# Allegro board INA193_TEST_V10A.brd
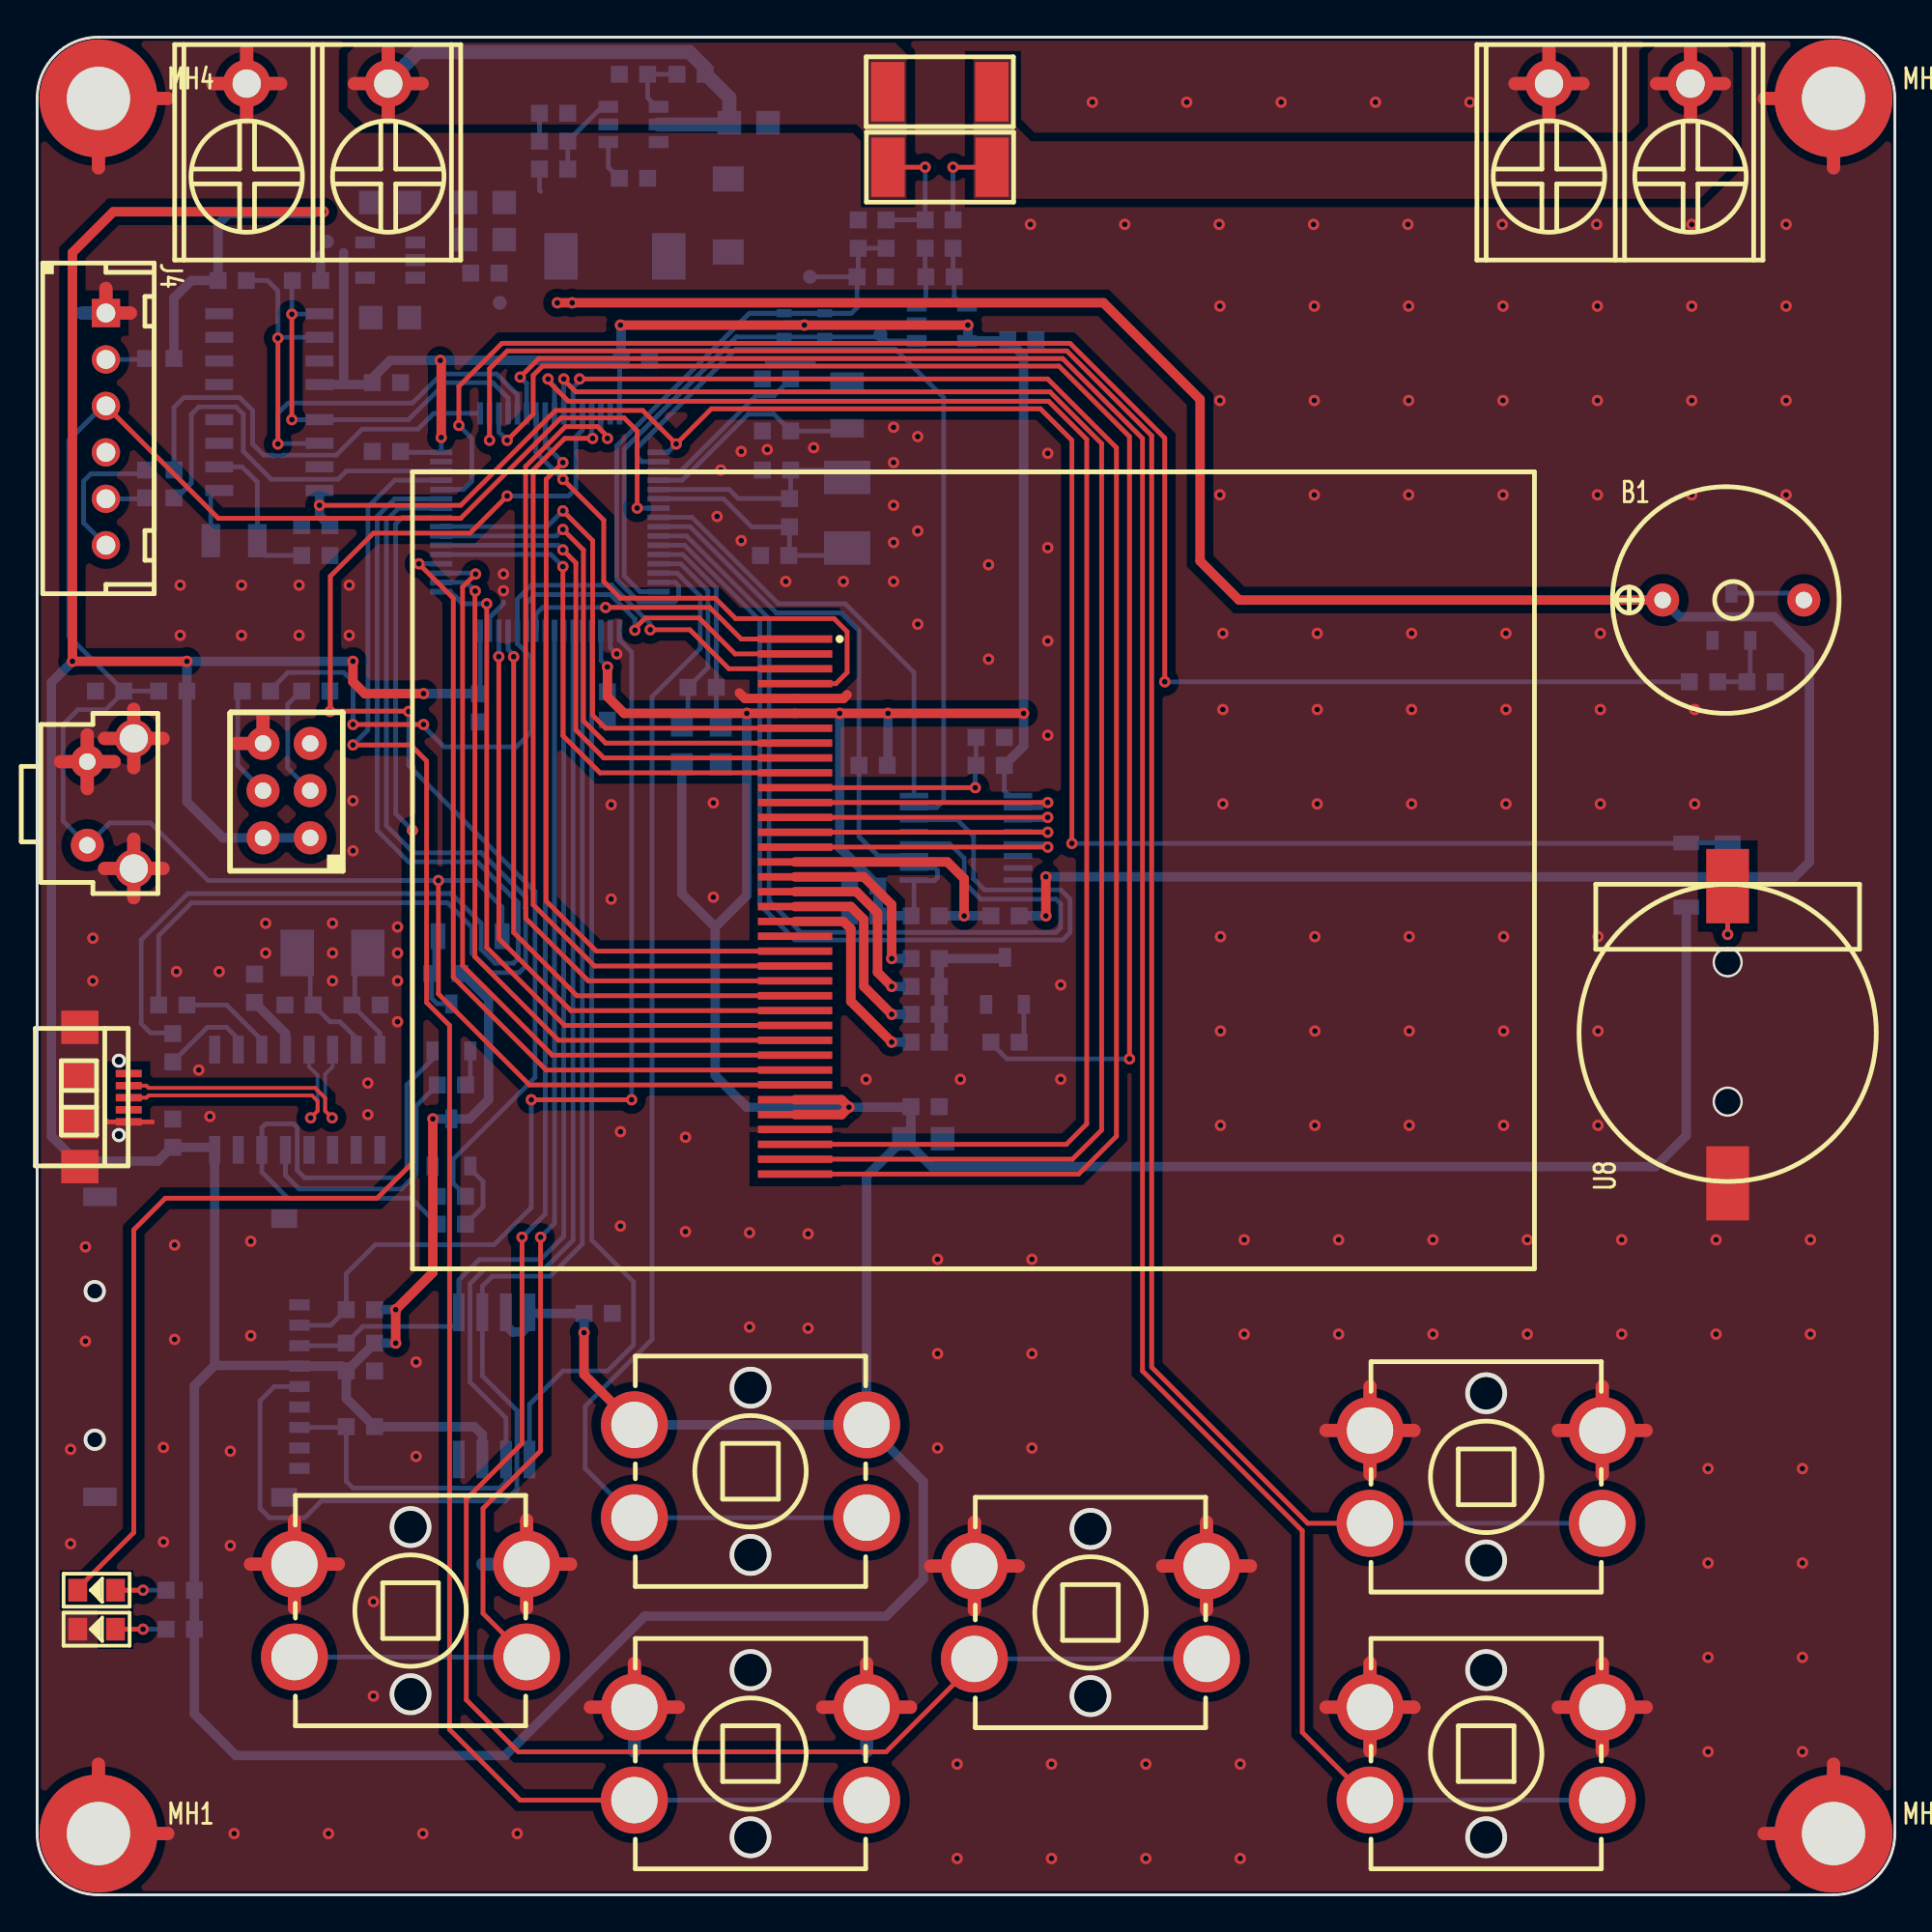
[diagram p0: board, top side]
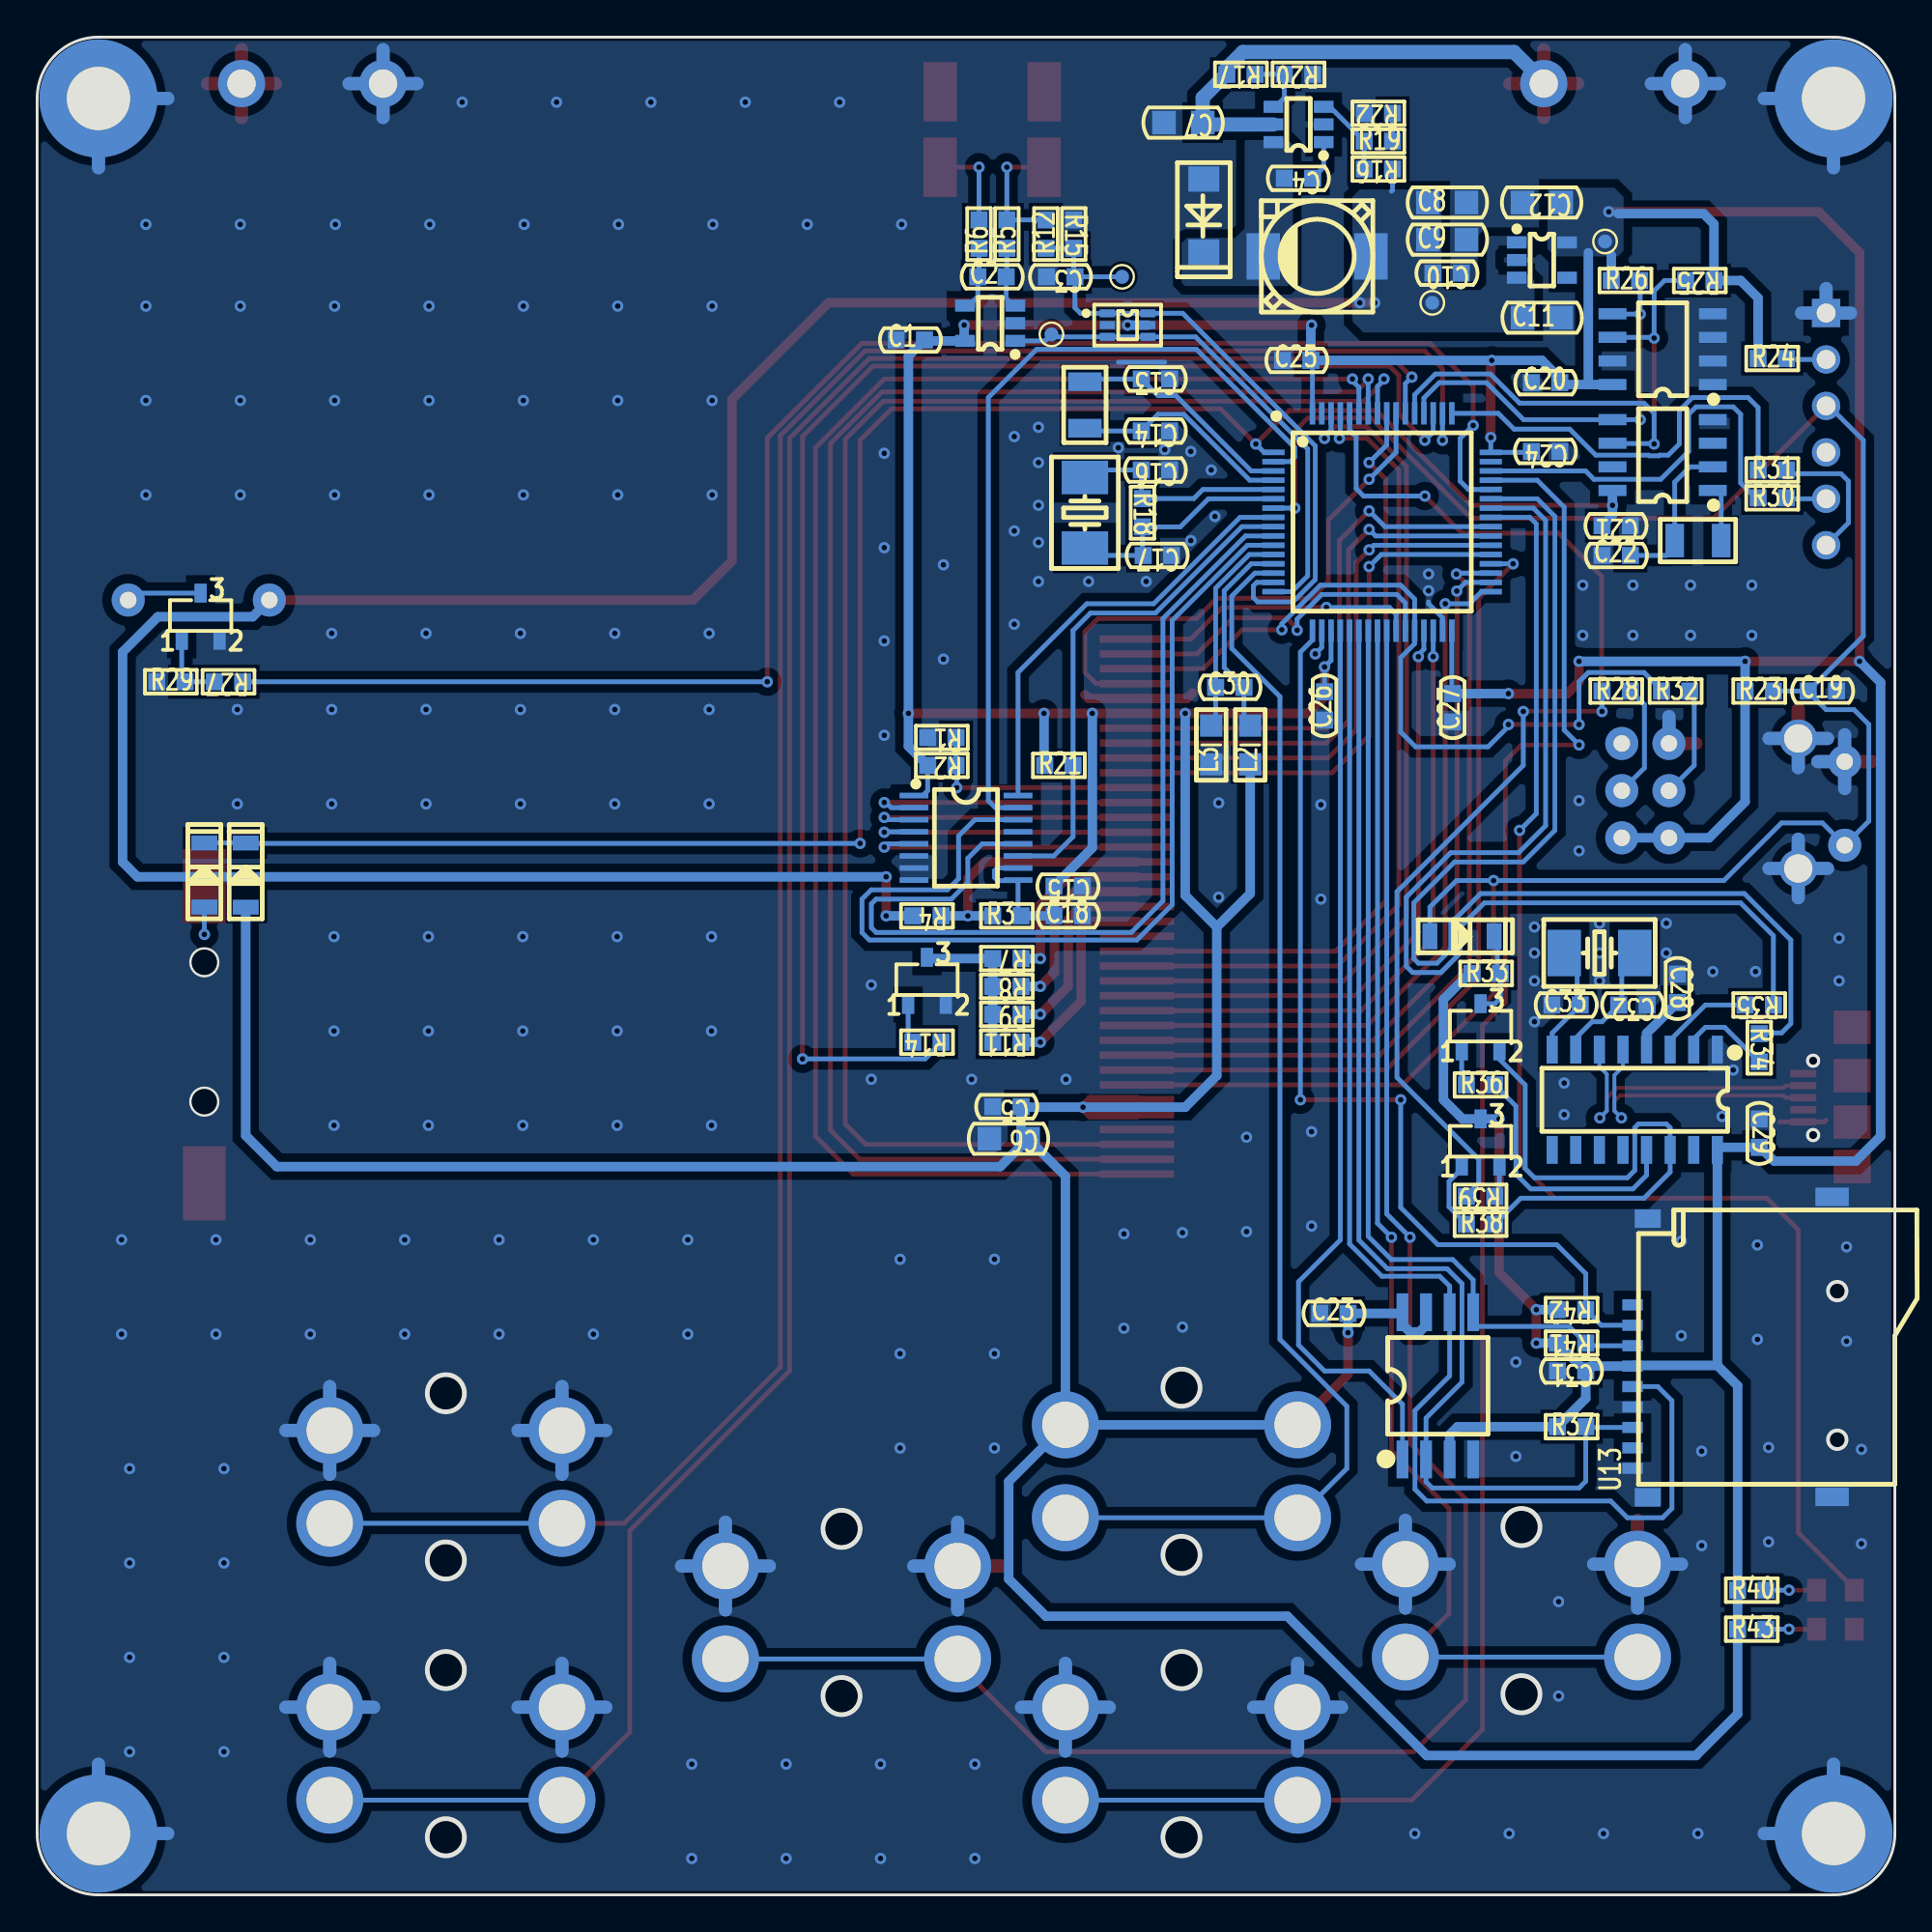
[diagram p1: board, bottom side, seen from below]

Outline 100 x 100 mm; copper layers: TOP, BOTTOM. Coordinates in mm from the lower left corner of the outline.
Outline path: 0,96.7 0,3.3 arc(0.97,0.97) 3.3,0 96.7,0 arc(99.03,0.97) 100,3.3 100,96.7 arc(99.03,99.03) 96.7,100 3.3,100 arc(0.97,99.03) 0,96.7

## Design rules (mm)
net group DP1: nets CH340_D+ CH340_D-

## Placement (name value [footprint] x y rotation side)
B1  BEEP  [BEEP_12X7R6]  87.5 69.7 0 top
C1  0.1uF_50V  [CC0603]  53 83.7 180 bottom
C2  0.1uF_50V  [CC0603]  48.6 87.1 180 bottom
C3  0.1uF_50V  [CC0603]  44.9 87.1 0 bottom
C4  100nF_50V  [CC0603]  32.1 92.4 0 bottom
C5  0.1uF_50V  [CC0603]  47.8 42.43 0 bottom
C6  10uF_25V  [CC0805]  47.7 40.7 0 bottom
C7  10uF_25V  [CC0805]  38.3 95.4 0 bottom
C8  10uF_25V  [CC0805]  24.1 91.1 180 bottom
C9  10uF_25V  [CC0805]  24.1 89.1 180 bottom
C10  0.1uF_50V  [CC0603]  24.1 87.3 0 bottom
C11  10uF_25V  [CC0805]  19 84.9 180 bottom
C12  10uF_25V  [CC0805]  19 91.1 0 bottom
C13  12pF_50V  [CC0603]  39.8 81.6 0 bottom
C14  12pF_50V  [CC0603]  39.8 78.8 0 bottom
C15  0.1uF_50V  [CC0603]  44.5 54.3 0 bottom
C16  20pF_50V  [CC0603]  39.8 76.7 0 bottom
C17  20pF_50V  [CC0603]  39.7 72.1 0 bottom
C18  0.1uF_50V  [CC0603]  44.5 52.7 180 bottom
C19  0.1uF_50V  [CC0603]  3.9 64.8 180 bottom
C20  0.1uF_50V  [CC0603]  18.8 81.4 180 bottom
C21  0.1uF_50V  [CC0603]  15 73.7 0 bottom
C22  12pF_50V  [CC0603]  15 72.1 180 bottom
C23  0.1uF_50V  [CC0603]  30.2 31.3 180 bottom
C24  0.1uF_50V  [CC0603]  18.8 77.7 0 bottom
C25  0.1uF_50V  [CC0603]  32.2 82.6 180 bottom
C26  0.1uF_50V  [CC0603]  30.7 64 90 bottom
C27  0.1uF_50V  [CC0603]  23.8 63.9 90 bottom
C28  0.1uF_50V  [CC0603]  11.7 48.8 270 bottom
C29  0.1uF_50V  [CC0603]  7.3 41 270 bottom
C30  0.1uF_50V  [CC0603]  35.8 65 180 bottom
C31  0.1uF_50V  [CC0603]  17.4 28.2 0 bottom
C32  20pF_50V  [CC0603]  14.1 47.9 0 bottom
C33  20pF_50V  [CC0603]  17.7 47.9 180 bottom
D1  SS14  [DO-214AC]  37.2 90.4 90 bottom
D2  1N4148W-TP  [SOD-123]  88.77 53.3 90 bottom
D3  1N4148W-TP  [SOD-123]  91 53.3 90 bottom
D4  1N4148W-TP  [SOD-123]  24.9 51.6 180 bottom
D5  LED_RED  [LED0805]  3.2 16.4 180 top
D6  LED_RED  [LED0805]  3.2 14.3 180 top
J1  -  [KF7R62-2P]  18.9 97.5 180 top
J2  -  [KF7R62-2P]  89 97.5 180 top
J3  -  [HEADER3X2_2R54]  14.7 56.9 90 top
J4  -  [XH-6A]  3.7 78.9 270 top
L1  SLF6028T-4R7M1R6-PF  [L-SLF6028]  31.1 88.2 90 bottom
L2  BEAD_BLM21PG600  [LC0805]  34.7 61.9 90 bottom
L3  BEAD_BLM21PG600  [LC0805]  36.8 61.9 90 bottom
MH1  Hold-M3  [HOLD250D134]  3.3 3.3 0 top
MH2  Hold-M3  [HOLD250D134]  96.7 3.3 0 top
MH3  Hold-M3  [HOLD250D134]  96.7 96.7 0 top
MH4  Hold-M3  [HOLD250D134]  3.3 96.7 0 top
Q1  S8050_NPN  [SOT23_123]  52.1 49.2 180 bottom
Q2  S8050_NPN  [SOT23_123]  91.2 68.8 180 bottom
Q3  S8050_NPN  [SOT23_123]  22.3 46.7 180 bottom
Q4  S8550_PNP  [SOT23_123]  22.3 40.5 180 bottom
R1  0R/NI  [RC0603]  51.3 62.3 0 bottom
R2  0R/NI  [RC0603]  51.3 60.8 0 bottom
R3  0R  [RC0603]  47.8 52.7 180 bottom
R4  0R/NI  [RC0603]  52.1 52.7 0 bottom
R5  10R  [RC0603]  47.8 89.4 90 bottom
R6  10R  [RC0603]  49.3 89.4 90 bottom
R7  10R  [RC0603]  47.8 50.4 0 bottom
R8  10R  [RC0603]  47.8 48.9 0 bottom
R9  10R  [RC0603]  47.8 47.4 0 bottom
R10  0R1  [RC2512]  48.6 93 180 top
R11  10R  [RC0603]  47.8 45.9 0 bottom
R12  100K  [RC0603]  45.7 89.4 90 bottom
R13  0R1  [RC2512]  48.59 97.06 180 top
R14  1K  [RC0603]  52.1 45.9 0 bottom
R15  10K  [RC0603]  44.2 89.4 270 bottom
R16  49.9k  [RC0603]  27.8 92.9 0 bottom
R17  100K  [RC0603]  35.2 98 0 bottom
R18  1M  [RC0603]  40.5 74.4 270 bottom
R19  0R  [RC0603]  27.8 94.4 180 bottom
R20  26.1K  [RC0603]  32.1 98 0 bottom
R21  100K  [RC0603]  45 60.8 180 bottom
R22  9.53K  [RC0603]  27.8 95.9 0 bottom
R23  10K  [RC0603]  7.3 64.8 180 bottom
R24  0R/NI  [RC0603]  6.6 82.7 180 bottom
R25  4.7K  [RC0603]  10.5 86.9 0 bottom
R26  4.7K  [RC0603]  14.5 86.9 180 bottom
R27  1K  [RC0603]  89.7 65.3 0 bottom
R28  10K  [RC0603]  15 64.8 180 bottom
R29  47K  [RC0603]  92.8 65.3 180 bottom
R30  0R  [RC0603]  6.6 75.2 180 bottom
R31  0R  [RC0603]  6.6 76.7 180 bottom
R32  10K  [RC0603]  11.8 64.8 180 bottom
R33  10K  [RC0603]  22 49.6 180 bottom
R34  0R  [RC0603]  7.3 45.6 270 bottom
R35  0R  [RC0603]  7.3 47.9 0 bottom
R36  1K  [RC0603]  22.3 43.6 180 bottom
R37  4.7K  [RC0603]  17.4 25.2 180 bottom
R38  1K  [RC0603]  22.3 36.1 180 bottom
R39  1K  [RC0603]  22.3 37.6 0 bottom
R40  2K  [RC0603]  7.7 16.4 180 bottom
R41  4.7K  [RC0603]  17.4 29.7 0 bottom
R42  4.7K  [RC0603]  17.4 31.5 0 bottom
R43  2K  [RC0603]  7.7 14.3 180 bottom
SW1  SWITCH  [SW-6X6X6-L]  2.7 61 270 top
SW2  KEY  [SW-B3F-4055]  38.4 22.8 0 top
SW3  KEY  [SW-B3F-4055]  20.1 15.3 0 top
SW4  KEY  [SW-B3F-4055]  56.7 15.2 0 top
SW5  KEY  [SW-B3F-4055]  38.4 7.6 0 top
SW6  KEY  [SW-B3F-4055]  78 22.5 0 top
SW7  KEY  [SW-B3F-4055]  78 7.6 0 top
TP1  TestPoint  [TP-0R75]  45.4 84 180 bottom
TP2  TestPoint  [TP-0R75]  41.6 87.1 180 bottom
TP3  TestPoint  [TP-0R75]  24.9 85.7 180 bottom
TP4  TestPoint  [TP-0R75]  15.6 89 180 bottom
U1  STM32F103RxT6  [LQFP-64]  27.6 73.9 270 bottom
U2  -  [TFT-2R4]  80.5 76.5 270 top
U3  INA193AIDBVT  [SOT23-5]  48.7 84.6 90 bottom
U4  NUP4202W1T2G  [SC-88]  41.3 84.5 180 bottom
U5  MP2459GJ-Z  [TSOT23-6]  32.1 95.3 90 bottom
U6  SPX3819M5-L-3-3/TR  [SOT23-5]  19 88 270 bottom
U7  XPT2046  [TSSOP-16]  50 56.9 270 bottom
U8  BATTERY_CR1220  [CR1220]  91 46.3 90 top
U9  PCF8563TS/5  [SOIC8]  12.5 77.5 90 bottom
U10  AT24C512C-SSHM-T  [SOIC8]  12.5 83.2 90 bottom
U11  W25Q128FVSIG  [SOIC-8_208]  24.6 27.4 180 bottom
U12  CH340G  [SOIC16]  14 42.8 0 bottom
U13  -  [TFCARD]  13.8 29.5 90 bottom
USB1  -  [USB-MICRO]  5 42.9 270 top
X1  XTAL_32768Hz_3215  [X-2P-3R2X1R5-SMD]  43.6 80.2 90 bottom
X2  XTAL_8MHz_5032  [X-2P-5R0X3R2-SMD]  43.6 74.4 90 bottom
X3  XTAL_32768Hz_3215  [X-2P-3R2X1R5-SMD]  10.6 72.9 0 bottom
X4  XTAL_12MHz_5032  [X-2P-5R0X3R2-SMD]  15.9 50.7 180 bottom

## Library data of the parts
B1 = BEEP_HC12085P
C1 C2 C4 C10 C24-C27 C30 = CAP NP_2
C3 C7-C9 C11 C12 = CAP NP_3
C5 C13-C18 C20-C23 C28 C29 C31-C33 = CAP NP
C6 C19 = C_Generic
D1 = DIODE13_0
D2-D4 = DIODE13_7
D5 D6 = LED_4
J1 J2 = CONN RCPT 2
J3 = CONN RCPT 3x2
J4 = CONN RCPT 6
L1 = INDUCTOR_0
L2 L3 = IND_BEAD_0805_600OHM_200MA
MH1-MH4 = Hold_1
Q1-Q3 = L14G1/TO_1
Q4 = L14G1/TO_0
R1-R43 = R_Generic
SW1-SW7 = SWITCH-SPST-4P
TP1-TP4 = TestPoint
U1 = STM32F103RxT6
U2 = TFT-2R4
U3 = 74AHC1G08_1
U4 = nup2202w1_D_2
U5 = MP2359DJ-LF-Z
U6 = SPX3819M5-L-1-2
U7 = XPT2046
U8 = BATTERY
U9 = PCF8563
U10 = AT24C512
U11 = W25Qxx
U12 = CH340G
U13 = TFCARD_1
USB1 = USB-MICRO
X1-X4 = XTAL_5032_0

## Footprints (pads in the part's own frame, mm; a bottom-side part is the same pattern mirrored in y, then rotated)
BEEP_12X7R6
  round 1.778 hole 0.889: 1(0,0) 2(7.6,0)
CC0603
  rect 0.914x0.914 smd: 1(-0.762,0) 2(0.762,0)
CC0805
  rect 1.27x1.27 smd: 1(-1.041,0) 2(1.041,0)
CR1220
  rect 4x2.3 smd: 1(8,0) 2(-8,0)
DO-214AC
  rect 1.36x1.67 smd: 1(1.965,0) 2(-1.965,0)
HEADER3X2_2R54
  round 1.778 hole 0.889: 1(0,0) 2(0,2.54) 3(2.54,0) 4(2.54,2.54) 5(5.08,0) 6(5.08,2.54)
HOLD250D134
  round 6.35 hole 3.404: 1(0,0)
KF7R62-2P
  round 2.54 hole 1.524: 1(0,0) 2(7.62,0)
L-SLF6028
  rect 2.5x1.8 smd: 1(0,2.9) 2(0,-2.9)
LC0805
  rect 1.194x1.194 smd: 1(-1.041,0) 2(1.041,0)
LED0805
  rect 1.016x1.219 smd: 1(-1.016,0) 2(1.016,0)
LQFP-64
  rect 0.3x1.2 smd: 1(-3.75,-5.85) 2(-3.25,-5.85) 3(-2.75,-5.85) 4(-2.25,-5.85) 5(-1.75,-5.85) 6(-1.25,-5.85) 7(-0.75,-5.85) 8(-0.25,-5.85) 9(0.25,-5.85) 10(0.75,-5.85) 11(1.25,-5.85) 12(1.75,-5.85) 13(2.25,-5.85) 14(2.75,-5.85) 15(3.25,-5.85) 16(3.75,-5.85) 33(3.75,5.85) 34(3.25,5.85) 35(2.75,5.85) 36(2.25,5.85) 37(1.75,5.85) 38(1.25,5.85) 39(0.75,5.85) 40(0.25,5.85) 41(-0.25,5.85) 42(-0.75,5.85) 43(-1.25,5.85) 44(-1.75,5.85) 45(-2.25,5.85) 46(-2.75,5.85) 47(-3.25,5.85) 48(-3.75,5.85)
  rect 1.2x0.3 smd: 17(5.85,-3.75) 18(5.85,-3.25) 19(5.85,-2.75) 20(5.85,-2.25) 21(5.85,-1.75) 22(5.85,-1.25) 23(5.85,-0.75) 24(5.85,-0.25) 25(5.85,0.25) 26(5.85,0.75) 27(5.85,1.25) 28(5.85,1.75) 29(5.85,2.25) 30(5.85,2.75) 31(5.85,3.25) 32(5.85,3.75) 49(-5.85,3.75) 50(-5.85,3.25) 51(-5.85,2.75) 52(-5.85,2.25) 53(-5.85,1.75) 54(-5.85,1.25) 55(-5.85,0.75) 56(-5.85,0.25) 57(-5.85,-0.25) 58(-5.85,-0.75) 59(-5.85,-1.25) 60(-5.85,-1.75) 61(-5.85,-2.25) 62(-5.85,-2.75) 63(-5.85,-3.25) 64(-5.85,-3.75)
RC0603
  rect 0.914x0.914 smd: 1(-0.762,0) 2(0.762,0)
RC2512
  rect 1.8x3.2 smd: 1(-2.8,0) 2(2.8,0)
SC-88
  rect 0.813x0.432 smd: 1(-1.092,0.635) 2(-1.092,0) 3(-1.092,-0.635) 4(1.092,-0.635) 5(1.092,0) 6(1.092,0.635)
SOD-123
  rect 0.8x1.4 smd: 1(-0.127,0) 2(3.327,0)
SOIC8
  rect 0.6x1.5 smd: 1(-1.9,-2.7) 2(-0.63,-2.7) 3(0.64,-2.7) 4(1.91,-2.7) 5(1.91,2.7) 6(0.64,2.7) 7(-0.63,2.7) 8(-1.9,2.7)
SOIC16
  rect 0.6x1.5 smd: 1(-4.445,-2.7) 2(-3.175,-2.7) 3(-1.905,-2.7) 4(-0.635,-2.7) 5(0.635,-2.7) 6(1.905,-2.7) 7(3.175,-2.7) 8(4.445,-2.7) 9(4.445,2.7) 10(3.175,2.7) 11(1.905,2.7) 12(0.635,2.7) 13(-0.635,2.7) 14(-1.905,2.7) 15(-3.175,2.7) 16(-4.445,2.7)
SOIC-8_208
  rect 0.635x2.032 smd: 1(-1.905,-3.962) 2(-0.635,-3.962) 3(0.635,-3.962) 4(1.905,-3.962) 5(1.905,3.962) 6(0.635,3.962) 7(-0.635,3.962) 8(-1.905,3.962)
SOT23-5
  rect 0.65x1.06 smd: 1(-0.95,-1.354) 2(0,-1.354) 3(0.95,-1.354) 4(0.95,1.354) 5(-0.95,1.354)
SOT23_123
  rect 0.66x1.016 smd: 1(-1.016,-1.27) 2(1.016,-1.27) 3(0,1.27)
SW-6X6X6-L
  round 2.032 hole 1.524: 1(-1.25,2.5) 4(5.75,2.5)
  round 1.778 hole 0.889: 2(0,0) 3(4.5,0)
SW-B3F-4055
  round 3.609 hole 2.489: 1(-6.25,2.5) 2(6.25,2.5) 3(-6.25,-2.5) 4(6.25,-2.5)
TFCARD
  rect 0.6x1.1 smd: 1(2.26,0.32) 2(1.16,0.32) 3(0.06,0.32) 4(-1.04,0.32) 5(-2.14,0.32) 6(-3.24,0.32) 7(-4.34,0.32) 8(-5.44,0.32) 9(-6.54,0.32)
  rect 1x1.4 smd: 10(-8.1,-0.5) 13(6.9,-0.5)
  rect 1x1.8 smd: 11(-8.074,-10.422) 12(8.074,-10.422)
TFT-2R4
  rect 0.4x4 smd: 1(8.9,-39.7) 2(9.7,-39.7) 3(10.5,-39.7) 4(11.3,-39.7) 5(12.1,-39.7) 6(12.9,-39.7) 7(13.7,-39.7) 8(14.5,-39.7) 9(15.3,-39.7) 10(16.1,-39.7) 11(16.9,-39.7) 12(17.7,-39.7) 13(18.5,-39.7) 14(19.3,-39.7) 15(20.1,-39.7) 16(20.9,-39.7) 17(21.7,-39.7) 18(22.5,-39.7) 19(23.3,-39.7) 20(24.1,-39.7) 21(24.9,-39.7) 22(25.7,-39.7) 23(26.5,-39.7) 24(27.3,-39.7) 25(28.1,-39.7) 26(28.9,-39.7) 27(29.7,-39.7) 28(30.5,-39.7) 29(31.3,-39.7) 30(32.1,-39.7) 31(32.9,-39.7) 32(33.7,-39.7) 33(34.5,-39.7) 34(35.3,-39.7) 35(36.1,-39.7) 36(36.9,-39.7) 37(37.7,-39.7)
TP-0R75
  round 0.75 smd: 1(0,0)
TSOT23-6
  rect 0.65x1.06 smd: 1(-0.95,-1.354) 2(0,-1.354) 3(0.95,-1.354) 4(0.95,1.354) 5(0,1.354) 6(-0.95,1.354)
TSSOP-16
  rect 0.3x1.55 smd: 1(-2.275,-2.8) 2(-1.625,-2.8) 3(-0.975,-2.8) 4(-0.325,-2.8) 5(0.325,-2.8) 6(0.975,-2.8) 7(1.625,-2.8) 8(2.275,-2.8) 9(2.275,2.8) 10(1.625,2.8) 11(0.975,2.8) 12(0.325,2.8) 13(-0.325,2.8) 14(-0.975,2.8) 15(-1.625,2.8) 16(-2.275,2.8)
USB-MICRO
  rect 0.4x1.4 smd: 1(-1.31,-0.07) 2(-0.66,-0.07) 3(-0.01,-0.07) 4(0.64,-0.07) 5(1.29,-0.07)
  rect 1.8x2 smd: 6(-3.8,-2.7) 7(-1.2,-2.7) 8(1.3,-2.7) 9(3.7,-2.7)
X-2P-3R2X1R5-SMD
  rect 1x1.8 smd: 1(-1.25,0) 2(1.25,0)
X-2P-5R0X3R2-SMD
  rect 1.8x2.5 smd: 1(-1.9,0) 2(1.9,0)
XH-6A
  rect 1.524x1.524 hole 1.016: 1(-6.25,0)
  round 1.524 hole 1.016: 2(-3.75,0) 3(-1.25,0) 4(1.25,0) 5(3.75,0) 6(6.25,0)

## Nets
GND: C1.1 C3.2 C5.2 C6.2 C7.2 C8.2 C9.2 C10.1 C11.2 C12.2 C13.1 C14.1 C15.1 C16.1 C17.1 C18.2 C19.2 C20.1 C21.1 C22.1 C23.1 C24.1 C25.1 C26.1 C27.1 C28.1 C29.1 C31.2 C32.1 C33.1 D1.1 D6.2(CATHODE) J1.2 J2.2 J3.5 J3.6 J4.1 L3.1(A) MH1.1 MH2.1 MH3.1 MH4.1 Q1.2(E) Q2.2(E) R1.2 R15.1 R20.1 R22.2 R29.1 SW1.1 SW1.2 SW1.4 SW3.1 SW3.2 SW4.1 SW4.2 SW5.1 SW5.2 SW6.1 SW6.2 SW7.1 SW7.2 U1.18(VSS_1) U1.31(VSS_2) U1.47(VSS_3) U1.63(VSS_4) U2.5(GND1) U2.34(GND) U3.2(GND) U4.2 U5.2(GND) U6.2(GND) U7.6(GND) U7.7(VBAT) U7.8(AUX) U8.2 U9.4(VSS) U10.1(A0) U10.2(A1) U10.3(A2) U10.4(GND) U10.7(WP) U11.4(GND) U12.1(GND) U13.6(GND) U13.9 U13.10 U13.11 U13.12 U13.13 USB1.5(GND) USB1.6(P_2) USB1.7(P_1) USB1.8(P_3) USB1.9(P_4)
VBAT: C21.2 D2.2(CATHODE) D3.2(CATHODE) U1.1(VBAT) U9.8(VDD)
VCC_3.3V: C1.2 C5.1 C6.1 C12.1 C15.2 C18.1 C20.2 C23.2 C24.2 C25.2 C26.2 C27.2 C29.2 C31.1 D2.1(ANODE) J3.1 J3.2 L2.1(A) Q4.3(C) R2.2 R3.2 R21.1 R23.1 R24.1 R25.1 R26.1 R33.1 R37.1 R40.1 R41.2 R42.2 R43.1 SW2.1 SW2.2 TP4.1 U1.19(VDD_1) U1.32(VDD_2) U1.48(VDD_3) U1.64(VDD_4) U2.6(VCC1) U2.32(VCI) U2.33(VCC2) U3.5(V+) U4.5 U6.5(VOUT) U7.1(VCC) U7.9(VREF) U7.10(IOVDD) U10.8(VCC) U11.3(W\P\) U11.7(H\O\L\D\) U11.8(VCC) U12.16(VCC) U13.4(VCC)
VCC_5V: B1.1(P) C8.1 C9.1 C10.2 C11.1 L1.2 R4.2 R16.1 TP3.1 U6.1(VIN) U6.3(EN)
VCC_IN: C7.1 J1.1 R5.2 R10.2 R12.2 R13.2 R17.2 U5.5(IN)
VCC_OUT: J2.1 R6.2 R10.1 R13.1
VDDA: C30.2 L2.2(B) U1.13(VDDA)
VSSA: C30.1 L3.2(B) U1.12(VSSA)
BOOT0: R28.1 R39.2 U1.60(BOOT0)
BOOT1: R32.1 U1.28(PB2) U2.3(DB2)
CH340_D+: U12.5(UD+) USB1.3(D+)
CH340_D-: U12.6(UD-) USB1.2(D-)
CTL_BEEP: R27.1 U1.44(PA11)
DTR#: R36.2 U12.13(DTR#)
F_CS: U1.20(PA4) U11.1(C\S\)
IIC_SCL: R25.2 U1.53(PC12) U9.6(SCL) U10.6(SCL)
IIC_SDA: R26.2 U1.52(PC11) U9.5(SDA) U10.5(SDA)
IM0: R1.1 R2.1 U2.11(IMO/NC)
JTCK: R31.1 U1.49(PA14)
JTDI: SW6.3 SW6.4 U1.50(PA15)
JTDO: U1.55(PB3) U2.4(DB3)
JTMS: R30.1 U1.46(PA13)
JTRST: U1.56(PB4) U2.22(DB4)
KEY0: SW3.3 SW3.4 U1.24(PC4)
KEY1: SW4.3 SW4.4 U1.25(PC5)
KEY2: SW5.3 SW5.4 U1.45(PA12)
KEY4: SW7.3 SW7.4 U1.54(PD2)
LCD_BL: R14.1 U1.51(PC10)
LCD_CS: U1.40(PC9) U2.7(C\S\)
LCD_D0: U1.26(PB0) U2.1(DB0)
LCD_D1: U1.27(PB1) U2.2(DB1)
LCD_D5: U1.57(PB5) U2.35(DB5)
LCD_D6: U1.58(PB6) U2.36(DB6)
LCD_D7: U1.59(PB7) U2.37(DB7)
LCD_D8: U1.61(PB8) U2.23(DB8)
LCD_D9: U1.62(PB9) U2.24(DB9)
LCD_D10: U1.29(PB10) U2.25(DB10)
LCD_D11: U1.30(PB11) U2.26(DB11)
LCD_D12: U1.33(PB12) U2.27(DB12)
LCD_D13: U1.34(PB13) U2.28(DB13)
LCD_D14: U1.35(PB14) U2.29(DB14)
LCD_D15: U1.36(PB15) U2.30(DB15)
LCD_LEDA: R3.1 R4.1 U2.16(LEDA)
LCD_LEDK1: R7.1 U2.17(LEDK1)
LCD_LEDK2: R8.1 U2.18(LEDK2)
LCD_LEDK3: R9.1 U2.19(LEDK3)
LCD_LEDK4: R11.1 U2.20(LEDK4)
LCD_RD: U1.37(PC6) U2.10(R\D\)
LCD_RS: U1.39(PC8) U2.8(RS)
LCD_WR: U1.38(PC7) U2.9(W\R\)
LED0: D5.2(CATHODE) U1.41(PA8)
NRST: C19.1 D4.1(ANODE) J4.3 R23.2 SW1.3 U1.7(NRST) U2.31(R\E\S\E\T\)
OSC32_IN: C13.2 U1.3(PC14/OSC32_IN) X1.2
OSC32_OUT: C14.2 U1.4(PC15/OSC32_OUT) X1.1
OSC_IN: C16.2 R18.1 U1.5(PD0) X2.2
OSC_OUT: C17.2 R18.2 U1.6(PD1) X2.1
PC0: U1.8(PC0) U7.16(DCLK)
PC1: R21.2 U1.9(PC1) U7.11(P\E\N\I\R\Q\)
PC2: U1.10(PC2) U7.12(DOUT)
PC3: U1.11(PC3) U7.14(DIN)
PC13: U1.2(PC13) U7.15(C\S\)
RTS#: Q3.2(E) R38.2 U12.14(RTS#)
RXD: R35.2 U12.3(RXD)
SD_CS: R42.1 U1.17(PA3) U13.2(DAT3)
SPI1_MISO: R37.2 U1.22(PA6) U11.2(DO) U13.7(DAT0)
SPI1_MOSI: R41.1 U1.23(PA7) U11.5(DI) U13.3(CMD)
SPI1_SCK: U1.21(PA5) U11.6(CLK) U13.5(CLK)
SWCLK: J4.6 R31.2
SWDIO: J4.5 R30.2
TXD: R34.2 U12.2(TXD)
U1_RXD: R34.1 U1.43(PA10)
U1_TXD: R35.1 U1.42(PA9)
WK_UP: SW2.3 SW2.4 U1.14(PA0)
WORK_CURR: TP1.1 U1.16(PA2) U3.1(OUT) U4.3 U4.4
WORK_VOLT: C3.1 R12.1 R15.2 TP2.1 U1.15(PA1) U4.1 U4.6
X+: U2.12(X+) U7.2(XP)
X-: U2.14(X-) U7.4(XN)
Y+: U2.13(Y+) U7.3(YP)
Y-: U2.15(Y-) U7.5(YN)
N16347098: J4.2 R24.2
N16758351: J3.4 R32.2
N16765796: D5.1(ANODE) R40.2
N16765844: D6.1(ANODE) R43.2
N16768175: D4.2(CATHODE) Q3.3(C) R33.2
N16768221: Q3.1(B) R36.1
N16768285: Q4.1(B) R38.1
N16768335: Q4.2(E) R39.1
N16768347: C32.2 U12.7(XI) X4.2
N16768483: C28.2 U12.4(V3)
N16768587: C33.2 U12.8(XO) X4.1
N16779903: Q1.3(C) R7.2 R8.2 R9.2 R11.2
N16788225: C22.2 U9.2(OSCO) X3.2
N16788621: U9.1(OSCI) X3.1
N16797952: Q2.1(B) R27.2 R29.2
N16797968: B1.2(G) Q2.3(C)
N16802315: C2.1 R6.1 U3.4(VIN-)
N16802319: C2.2 R5.1 U3.3(VIN+)
N16805416: R19.2 R22.1
N16805446: C4.2 D1.2 L1.1 U5.6(SW)
N16805448: C4.1 U5.1(BST)
N16805476: R16.2 R19.1 U5.3(FB)
N16816363: R17.1 R20.2 U5.4(EN)
N163465880: D3.1(ANODE) U8.1
N167571795: J3.3 R28.2
N167799601: Q1.1(B) R14.2

Pads without a net: J4 4; U2 21; U6 4; U7 13; U9 3 7; U12 9 10 11 12 15; U13 1 8; USB1 1 4

## Via types
v1: diameter 0.61, hole 0.305, TOP to BOTTOM, 278 vias

## Routing (per net, layer and track width the routed paths; a pad name or vN(x,y) marks a point on that pad's centre or on a via; arc(x,y) is an arc through that point)
GND: length 325.3
  TOP w0.254: 6.2,41.6 6.19,41.61 USB1.5 3.79,41.61 3.7,41.7
  TOP w0.508: 43.6,64.6 43.4,64.4 U2.5 38.1,64.4 37.8,64.7
  TOP w0.711: SW5.2 44.65,12.46 ; SW5.2 42.29,10.1 ; SW5.2 47.01,10.1 ; SW5.1 32.15,12.46 ; SW5.1 34.51,10.1 ; SW5.1 29.79,10.1 ; SW6.1 74.11,25 ; SW6.1 69.39,25 ; SW6.1 71.75,27.36 ; SW6.1 71.75,22.64 ; SW6.2 86.61,25 ; SW6.2 84.25,22.64 ; SW6.2 81.89,25 ; SW6.2 84.25,27.36 ; J2.2 81.38,99.33 ; J2.2 83.21,97.5 ; J2.2 79.55,97.5 ; J2.2 81.38,95.67 ; 7.03,3.3 MH1.1 3.3,7.03 ; SW1.4 6.78,55.25 ; SW1.4 3.62,55.25 ; SW1.4 5.2,53.67 ; SW1.4 5.2,56.83 ; SW3.1 13.85,20.16 ; SW3.1 16.21,17.8 ; SW3.1 11.49,17.8 ; SW3.1 13.85,15.44 ; 5.02,85.15 J4.1 3.7,86.47 ; 2.7,59.55 SW1.2 ; SW1.2 1.25,61 ; SW1.2 2.7,62.45 ; SW1.2 4.15,61 ; SW4.2 65.31,17.7 ; SW4.2 62.95,15.34 ; SW4.2 62.95,20.06 ; SW4.2 60.59,17.7 ; 12.16,63.43 J3.6 10.71,61.98 ; SW3.2 28.71,17.8 ; SW3.2 26.35,20.16 ; SW3.2 26.35,15.44 ; 5.2,60.67 SW1.1 ; SW1.1 5.2,63.83 ; SW1.1 3.62,62.25 ; SW1.1 6.78,62.25 ; 84.25,7.74 SW7.2 ; SW7.2 84.25,12.46 ; SW7.2 81.89,10.1 ; SW7.2 86.61,10.1 ; 3.3,92.97 MH4.1 7.03,96.7 ; SW7.1 71.75,12.46 ; SW7.1 69.39,10.1 ; SW7.1 74.11,10.1 ; SW7.1 71.75,7.74 ; J1.2 11.28,99.33 ; J1.2 11.28,95.67 ; J1.2 13.11,97.5 ; J1.2 9.45,97.5 ; 96.7,92.97 MH3.1 92.97,96.7 ; SW4.1 52.81,17.7 ; SW4.1 50.45,20.06 ; SW4.1 50.45,15.34 ; SW4.1 48.09,17.7 ; 92.97,3.3 MH2.1 96.7,7.03
  BOTTOM w0.254: U1.18 30.85,67.15 v1(31.2,66.8) ; U1.31 24.35,68.75 25.1,69.5 25.1,69.6 ; 39.3,82.5 41.8,82.5
  BOTTOM w0.711: J3.6 12.16,63.43 ; 50.45,15.34 SW4.1 ; SW4.1 50.45,20.06 ; SW4.1 52.81,17.7 ; 96.7,7.03 MH2.1 92.97,3.3 ; 84.25,7.74 SW7.2 ; SW7.2 86.61,10.1 ; SW7.2 84.25,12.46 ; SW7.2 81.89,10.1 ; 92.97,96.7 MH3.1 96.7,92.97 ; SW1.4 5.2,56.83 ; SW1.4 3.62,55.25 ; SW1.4 6.78,55.25 ; SW1.4 5.2,53.67 ; 84.25,22.64 SW6.2 ; SW6.2 84.25,27.36 ; SW6.2 86.61,25 ; SW6.2 81.89,25 ; 7.03,3.3 MH1.1 3.3,7.03 ; SW7.1 74.11,10.1 ; SW7.1 71.75,12.46 ; SW7.1 69.39,10.1 ; SW7.1 71.75,7.74 ; 26.35,15.44 SW3.2 ; SW3.2 23.99,17.8 ; SW3.2 26.35,20.16 ; SW3.2 28.71,17.8 ; J2.2 81.38,99.33 ; J2.2 83.21,97.5 ; J2.2 79.55,97.5 ; J2.2 81.38,95.67 ; SW6.1 74.11,25 ; SW6.1 69.39,25 ; SW6.1 71.75,27.36 ; SW6.1 71.75,22.64 ; SW3.1 16.21,17.8 ; SW3.1 11.49,17.8 ; SW3.1 13.85,15.44 ; SW5.1 34.51,10.1 ; SW5.1 32.15,7.74 ; SW5.1 29.79,10.1 ; SW5.1 32.15,12.46 ; 7.03,96.7 MH4.1 3.3,92.97 ; SW5.2 47.01,10.1 ; SW5.2 44.65,12.46 ; SW5.2 42.29,10.1 ; SW5.2 44.65,7.74 ; 9.45,97.5 J1.2 ; J1.2 11.28,99.33 ; J1.2 11.28,95.67 ; J1.2 13.11,97.5 ; SW4.2 62.95,20.06 ; SW4.2 65.31,17.7 ; SW4.2 62.95,15.34 ; SW4.2 60.59,17.7 ; 2.38,85.15 J4.1 ; J4.1 3.7,86.47 ; J4.1 5.02,85.15 ; 5.2,60.67 SW1.1 ; SW1.1 6.78,62.25 ; SW1.1 3.62,62.25 ; SW1.2 2.7,62.45 ; SW1.2 4.15,61 ; SW1.2 2.7,59.55
  vias: v1(1.8,23.98) v1(1.8,18.9) v1(2.6,34.88) v1(2.6,29.8) v1(3,51.5) v1(3,49.2) v1(6.8,24.08) v1(6.8,19) v1(7.4,34.98) v1(7.4,29.9) v1(7.5,49.7) v1(7.7,70.5) v1(7.7,67.8) v1(8.7,44.4) v1(9.3,41.9) v1(9.8,49.7) v1(10.4,23.88) v1(10.4,18.8) v1(10.6,3.3) v1(11,70.5) v1(11,67.8) v1(11.5,35.18) v1(11.5,30.1) v1(12.3,52.3) v1(12.3,50.7) v1(14.1,70.5) v1(14.1,67.8) v1(15.68,3.3) v1(15.9,52.3) v1(15.9,50.7) v1(15.9,49.2) v1(16.8,70.5) v1(16.8,67.8) v1(17,58.9) v1(17,56.2) v1(17.8,43.7) v1(17.8,42) v1(18.1,15.78) v1(18.1,10.7) v1(19.4,52.1) v1(19.4,50.7) v1(19.4,49.2) v1(19.4,47) v1(20.4,28.68) v1(20.4,23.6) v1(20.76,3.3) v1(25.1,71.1) v1(25.1,70.2) v1(25.84,3.3) v1(30.9,58.68) v1(30.9,53.6) v1(31.4,41.08) v1(31.4,36) v1(34.9,40.78) v1(34.9,35.7) v1(36.4,58.78) v1(36.4,53.7) v1(36.6,74.2) v1(36.8,76.7) v1(37.9,77.7) v1(37.9,72.9) v1(38.35,35.65) v1(38.35,30.57) v1(39.3,77.8) v1(40.3,70.7) v1(41.5,35.58) v1(41.5,30.5) v1(41.8,77.9) v1(43.4,70.7) v1(44.62,43.9) v1(46.1,79) v1(46.1,77.1) v1(46.1,74.8) v1(46.1,72.8) v1(46.1,70.7) v1(47.4,78.5) v1(47.4,73.42) v1(47.4,68.4) v1(48.47,34.21) v1(48.47,29.13) v1(48.47,24.05) v1(49.52,7.04) v1(49.52,1.96) v1(49.7,43.9) v1(51.21,71.6) v1(51.21,66.52) v1(53.47,89.92) v1(53.55,34.21) v1(53.55,29.13) v1(53.55,24.05) v1(54.4,77.6) v1(54.4,72.52) v1(54.4,67.5) v1(54.4,62.42) v1(54.6,7.04) v1(54.6,1.96) v1(55.1,48.98) v1(55.1,43.9) v1(56.8,96.5) v1(58.55,89.92) v1(59.68,7.04) v1(59.68,1.96) v1(61.88,96.5) v1(63.63,89.92) v1(63.67,85.52) v1(63.67,80.44) v1(63.67,75.36) v1(63.7,51.58) v1(63.7,46.5) v1(63.7,41.42) v1(63.83,67.91) v1(63.83,63.81) v1(63.83,58.73) v1(64.76,7.04) v1(64.76,1.96) v1(64.98,35.26) v1(64.98,30.18) v1(66.96,96.5) v1(68.71,89.92) v1(68.75,85.52) v1(68.75,80.44) v1(68.75,75.36) v1(68.78,51.58) v1(68.78,46.5) v1(68.78,41.42) v1(68.91,67.91) v1(68.91,63.81) v1(68.91,58.73) v1(70.06,35.26) v1(70.06,30.18) v1(72.04,96.5) v1(73.79,89.92) v1(73.83,85.52) v1(73.83,80.44) v1(73.83,75.36) v1(73.86,51.58) v1(73.86,46.5) v1(73.86,41.42) v1(73.99,67.91) v1(73.99,63.81) v1(73.99,58.73) v1(75.14,35.26) v1(75.14,30.18) v1(77.12,96.5) v1(78.87,89.92) v1(78.91,85.52) v1(78.91,80.44) v1(78.91,75.36) v1(78.94,51.58) v1(78.94,46.5) v1(78.94,41.42) v1(79.07,67.91) v1(79.07,63.81) v1(79.07,58.73) v1(80.22,35.26) v1(80.22,30.18) v1(83.95,89.92) v1(83.99,85.52) v1(83.99,80.44) v1(83.99,75.36) v1(84.02,51.58) v1(84.02,46.5) v1(84.02,41.42) v1(84.15,67.91) v1(84.15,63.81) v1(84.15,58.73) v1(85.3,35.26) v1(85.3,30.18) v1(89.07,89.92) v1(89.07,85.52) v1(89.07,80.44) v1(89.07,75.36) v1(89.23,63.81) v1(89.23,58.73) v1(89.94,22.94) v1(89.94,17.86) v1(89.94,12.78) v1(89.94,7.7) v1(90.38,35.26) v1(90.38,30.18) v1(94.15,89.92) v1(94.15,85.52) v1(94.15,80.44) v1(94.15,75.36) v1(95.02,22.94) v1(95.02,17.86) v1(95.02,12.78) v1(95.02,7.7) v1(95.46,35.26) v1(95.46,30.18)
VBAT: length 105.1
  TOP w0.254: v1(55.7,56.6) 55.7,78.3 54.01,79.99 36.29,79.99 v1(34.4,78.1) 32.59,79.91 27.91,79.91 22.8,74.8 v1(15.2,74.8)
  BOTTOM w0.254: v1(55.7,56.6) 88.75,56.6 D2.2 88.78,56.63 91,56.63 ; v1(34.4,78.1) 33.95,77.65 U1.1
  BOTTOM w0.508: C21.2 15.2,74.26 v1(15.2,74.8) U9.8
VCC_3.3V: length 541
  TOP w0.508: v1(17,66.4) 17,65.3 17.64,64.66 v1(20.8,64.66) ; v1(30.7,66.1) 30.7,64.5 31.6,63.6 v1(38.2,63.6) U2.6 v1(43.2,63.6) v1(45.8,63.6) v1(53.1,63.6) ; U2.32 43.3,42.8 v1(43.7,42.4) 43.3,42 U2.33 ; v1(50.1,84.5) v1(41.3,84.5) v1(31.4,84.5) ; v1(29.44,30.26) 29.44,28.01 SW2.1 ; v1(21.7,82.6) 21.75,82.55 v1(21.75,78.45) ; v1(21.3,41.77) 21.3,33.5 v1(19.3,31.5) v1(19.3,29.7) ; v1(15.4,90.6) 4.1,90.6 1.9,88.4 v1(1.9,66.4) v1(8.06,66.4)
  BOTTOM w0.254: R2.2 52.06,59.44 52.33,59.17 U7.1 ; C27.2 23.85,64.71 U1.32 ; U1.64 31.35,82.51 C25.2 ; v1(21.75,78.45) U1.48 19.61,77.65 C24.2 ; U7.10 48.33,55.27 48.47,55.13 48.47,54.77 48.29,54.59 47.23,54.59 U7.9 47.2,53.06 47.04,52.9 R3.2 ; U1.19 30.35,66.45 v1(30.7,66.1) C26.2
  BOTTOM w0.508: v1(29.44,30.26) C23.2 26.57,31.3 26.5,31.36 26.5,30.7 26.1,30.3 25.59,30.3 25.23,30.66 U11.7 ; R21.1 45.8,60.84 v1(45.8,63.6) ; 16.5,88.4 16.5,81.3 ; 16.5,81.3 17.94,81.3 C20.2 18.04,81.64 19,82.6 v1(21.7,82.6) C25.2 31.44,84.46 v1(31.4,84.5) ; 16.5,81.3 U10.8 ; SW2.2 44.65,38.69 C6.1 ; SW2.2 47.7,22.25 47.7,17 45.7,15 32.7,15 25.2,7.5 10.7,7.5 8.46,9.74 R43.1 R40.1 8.46,27.4 9.55,28.5 ; SW2.2 SW2.1 ; D2.1 88.77,40.87 87.1,39.2 48.16,39.2 C6.1 ; v1(19.3,29.7) R41.2 16.66,28.2 C31.1 ; v1(50.1,84.5) 50.1,83.7 U3.5 52.19,83.65 C1.2 53.1,82.84 v1(53.1,63.6) 53.1,61.84 R2.2 ; 36.5,52.1 34.7,53.9 L2.1 ; 36.5,52.1 38.2,53.8 v1(38.2,63.6) ; 36.5,52.1 36.5,44.1 38.2,42.4 v1(43.7,42.4) 47.01,42.4 C5.1 47.04,41.08 C6.1 ; R3.2 C18.1 C15.2 43.2,56.36 v1(43.2,63.6) ; v1(1.9,66.4) 0.77,65.27 0.77,40.83 2.1,39.5 6.5,39.5 7.24,40.24 C29.2 9.42,40.24 U12.16 9.55,28.5 ; v1(20.8,64.66) C27.2 ; 9.55,28.5 14.08,28.5 U13.4 16.38,28.46 C31.1 ; C31.1 16.64,26.72 R37.1 23.54,25.2 23.96,24.77 U11.3 ; v1(17,66.4) v1(8.06,66.4) R23.1 8.06,58.84 10,56.9 J3.2 J3.1 ; R24.1 7.36,85.96 8.3,86.9 R25.1 9.74,89.94 10.3,90.5 14.9,90.5 ; U4.5 v1(41.3,84.5) ; R26.1 15.26,88.27 ; v1(21.3,41.77) Q4.3 23.27,41.77 24.3,42.8 24.3,48.2 22.9,49.6 R33.1 ; R42.2 v1(19.3,31.5)
VCC_5V: length 137.8
  TOP w0.508: v1(54.3,52.7) v1(54.3,54.8) ; B1.1 64.7,69.7 62.6,71.8 62.6,80.5 57.4,85.7 v1(28.8,85.7) v1(28,85.7)
  BOTTOM w0.254: R16.1 27.04,91.76 27.1,91.7
  BOTTOM w0.508: B1.1 88.4,68.8 93.5,68.8 95.4,66.9 95.4,55.6 94.6,54.8 v1(54.3,54.8) ; R4.2 v1(54.3,52.7)
VCC_IN: length 39.8
  TOP w0.254: R10.2 v1(47.8,93)
  TOP w0.711: 18.9,95.67 J1.1 ; J1.1 18.9,99.33 ; J1.1 20.73,97.5 ; J1.1 17.07,97.5
  BOTTOM w0.254: v1(47.8,93) R5.2 R12.2
  BOTTOM w0.762: U5.5 37.16,95.3 C7.1 37.26,96.74 36,98 R17.2 35.96,98.34 35.1,99.2 20.5,99.2 18.9,97.6 J1.1
VCC_OUT: length 12.3
  TOP w0.254: R10.1 v1(49.3,93)
  TOP w0.711: 87.17,97.5 J2.1 ; J2.1 90.83,97.5 ; J2.1 89,99.33 ; J2.1 89,95.67
  BOTTOM w0.254: v1(49.3,93) R6.2
VDDA: length 11.1
  BOTTOM w0.254: U1.13 34.65,71.65 36.1,70.2 36.1,66.06 C30.2 35.04,63.28 L2.2
VSSA: length 11.4
  BOTTOM w0.254: L3.2 36.56,63.18 C30.1 36.56,70.34 34.75,72.15 U1.12
BOOT0: length 63
  TOP w0.254: v1(20,63.7) 19.98,63.72 15.78,63.72 ; 15.78,63.72 15.78,70.98 18.1,73.3 23.3,73.3 v1(25.3,75.3) ; 15.78,63.72 v1(15.76,63.7)
  BOTTOM w0.254: v1(15.76,63.7) R28.1 ; R39.2 23.06,37.64 22.4,38.3 22.4,39.6 26.8,44 26.8,54 20,60.8 v1(20,63.7) ; U1.60 29.35,78.85 29,78.5 29,75.7 28.6,75.3 v1(25.3,75.3)
BOOT1: length 42.7
  TOP w0.254: v1(33,68.1) 35.14,68.1 37.24,66 U2.3 ; v1(17,63) v1(20.8,63)
  BOTTOM w0.254: v1(33,68.1) 33,68.43 30.93,70.5 26.6,70.5 25.85,69.75 U1.28 25.85,67.35 26.6,66.6 26.6,62.6 25.8,61.8 21.9,61.8 20.8,62.9 v1(20.8,63) ; v1(17,63) 17,65.3 16.5,65.8 13.5,65.8 12.56,64.86 R32.1
CH340_D+: length 15.4
  TOP w0.203: USB1.3 5.88,42.91 6,43.03 14.79,43.03 15.1,42.73 15.1,42.37 15.1,42.2 v1(14.72,41.83)
  BOTTOM w0.203: U12.5 14.63,44.58 15.1,44.12 15.1,42.2 v1(14.72,41.83)
CH340_D-: length 16.1
  TOP w0.203: v1(15.88,41.83) 15.5,42.2 15.5,42.9 14.96,43.44 6,43.44 5.88,43.56 USB1.2
  BOTTOM w0.203: v1(15.88,41.83) 15.5,42.2 15.5,44.18 15.9,44.58 U12.6
CTL_BEEP: length 89.7
  TOP w0.254: v1(60.7,65.3) 60.7,78.42 55.6,83.52 25.02,83.52 22.7,81.2 v1(22.7,79.1)
  BOTTOM w0.254: R27.1 v1(60.7,65.3) ; v1(22.7,79.1) 23.4,78.4 23.4,76.1 22.95,75.65 U1.44
DTR#: length 14.3
  BOTTOM w0.254: R36.2 20.4,42.46 20.4,38.8 19.6,38 14.1,38 13.37,38.73 U12.13
F_CS: length 49.3
  BOTTOM w0.254: U1.20 29.85,35.25 32.1,33 32.1,29.6 30.7,28.2 28.3,28.2 26.5,26.41 26.5,23.44
IIC_SCL: length 31.6
  TOP w0.254: v1(12.96,83.8) v1(12.96,78.1)
  BOTTOM w0.254: 12.96,78.12 12.96,79.75 13.51,80.3 20.2,80.3 21.77,81.87 24.73,81.87 25.85,80.75 U1.53 ; 12.96,78.12 v1(12.96,78.1) ; 12.96,78.12 15.18,78.12 U9.6 ; R25.2 12.4,86.9 12.96,86.34 v1(12.96,83.8) 13,83.84 U10.6
IIC_SDA: length 22.6
  TOP w0.254: v1(13.71,79.41) v1(13.71,85.09)
  BOTTOM w0.254: R26.2 13.71,86.87 v1(13.71,85.09) 15.18,85.09 U10.5 ; U1.52 25.35,80.58 24.53,81.4 21.97,81.4 19.98,79.41 U9.5 v1(13.71,79.41)
IM0: length 12.4
  TOP w0.254: U2.11 v1(50.5,59.6)
  BOTTOM w0.254: v1(50.5,59.6) 50.5,60.76 R2.1 R1.1
JTCK: length 23.4
  BOTTOM w0.254: U1.49 21.35,79.75 20.5,78.9 17.5,78.9 16.1,77.5 13.26,77.5 13.22,77.47 12.7,77.47 12.66,77.5 12.2,77.5 11.6,78.1 11.6,79.9 10.9,80.6 7.9,80.6 7.36,80.06 R31.1
JTDI: length 121.1
  TOP w0.254: v1(24.35,78.3) 24.35,82.15 25.31,83.11 55.43,83.11 59.99,78.55 59.99,28.4 68.4,20 SW6.3
  BOTTOM w0.254: SW6.3 SW6.4 ; U1.50 v1(24.35,78.3)
JTDO: length 30
  TOP w0.254: v1(28.3,76.2) 30.5,74 30.5,70.7 31.4,69.8 36.5,69.8 37.6,68.7 42.9,68.7 43.6,68 43.6,65.8 43,65.2 U2.4
  BOTTOM w0.254: U1.55 26.85,77.65 v1(28.3,76.2)
JTMS: length 21.6
  BOTTOM w0.254: U1.46 16.65,76.65 16.2,76.2 12.6,76.2 11.1,77.7 11.1,79.7 10.7,80.1 8.7,80.1 8.3,79.7 8.3,76 7.5,75.2 R30.1
JTRST: length 41.5
  TOP w0.254: U2.22 30.1,50.8 27.4,53.5 27.4,76.2 v1(28.3,77.1)
  BOTTOM w0.254: U1.56 27.35,78.05 v1(28.3,77.1)
KEY0: length 70.3
  TOP w0.254: v1(27.1,35.4) 27.1,23.9 24,20.8 24,15.15 SW3.4
  BOTTOM w0.254: U1.24 27.85,36.15 v1(27.1,35.4) ; SW3.3 SW3.4
KEY1: length 102.5
  TOP w0.254: SW4.3 50.45,12.45 45.7,7.7 25.9,7.7 23.1,10.5 23.1,21.3 26.1,24.3 v1(26.1,35.4)
  BOTTOM w0.254: U1.25 27.35,36.65 v1(26.1,35.4) ; SW4.3 SW4.4
KEY2: length 98.7
  TOP w0.254: v1(17,61.9) 20.1,61.9 20.96,61.03 20.96,48.03 22.2,46.8 22.2,8.9 26,5.1 SW5.3
  BOTTOM w0.254: U1.45 19.25,76.15 17.8,74.7 17.8,62.7 v1(17,61.9) ; SW5.3 SW5.4
KEY4: length 128.7
  TOP w0.254: v1(26,81.7) 27,82.7 55.2,82.7 59.5,78.4 59.5,28.2 68.1,19.6 68.1,8.75 SW7.3
  BOTTOM w0.254: SW7.3 SW7.4 ; U1.54 26.35,81.35 v1(26,81.7)
LCD_BL: length 80.9
  TOP w0.254: v1(58.8,45) 58.8,78.5 55.01,82.29 27.2,82.29 26.7,81.79 26.7,79.7 v1(25.3,78.3)
  BOTTOM w0.254: v1(25.3,78.3) 24.85,78.75 U1.51 ; v1(58.8,45) 52.2,45 51.34,45.86 R14.1
LCD_CS: length 29.8
  TOP w0.254: U2.7 30.6,62.8 29.9,63.5 29.9,72.9 v1(28.3,74.5)
  BOTTOM w0.254: U1.40 27.45,73.65 v1(28.3,74.5)
LCD_D0: length 15.7
  TOP w0.254: U2.1 37.9,67.6 36.2,69.3 v1(30.6,69.3)
  BOTTOM w0.254: U1.26 26.85,68.95 27.2,69.3 v1(30.6,69.3)
LCD_D1: length 18.4
  TOP w0.254: U2.2 37.57,66.8 35.63,68.73 32.74,68.73 32.18,68.17 v1(32.18,68.08)
  BOTTOM w0.254: U1.27 26.35,69.54 26.81,70 30.85,70 32.18,68.68 v1(32.18,68.08)
LCD_D5: length 85.4
  TOP w0.254: v1(27.5,81.6) 27.5,81.5 28.6,80.4 54.45,80.4 56.5,78.35 56.5,41.5 55.4,40.4 U2.35
  BOTTOM w0.254: v1(27.5,81.6) 27.5,81.55 27.85,81.2 U1.57
LCD_D6: length 86.4
  TOP w0.254: v1(28.35,81.6) 28.35,81.55 29,80.91 54.52,80.91 57.3,78.13 57.3,41.17 55.73,39.6 U2.36
  BOTTOM w0.254: U1.58 v1(28.35,81.6)
LCD_D7: length 87.6
  TOP w0.254: v1(29.2,81.6) 54.4,81.6 58.1,77.9 58.1,40.84 56.06,38.8 U2.37
  BOTTOM w0.254: v1(29.2,81.6) 29.2,81.5 28.85,81.15 U1.59
LCD_D8: length 44.1
  TOP w0.254: v1(29.9,78.4) 28.4,78.4 26.7,76.7 26.7,53.3 30,50 U2.23
  BOTTOM w0.254: v1(29.9,78.4) 29.85,78.45 U1.61
LCD_D9: length 47.3
  TOP w0.254: U2.24 29.67,49.2 26.3,52.57 26.3,53.13 26.29,53.13 26.29,76.89 28.43,79.03 30.17,79.03 30.7,78.5 v1(30.7,78.4)
  BOTTOM w0.254: U1.62 30.35,78.85 30.7,78.5 v1(30.7,78.4)
LCD_D10: length 32.9
  TOP w0.254: v1(25.65,66.65) 25.65,51.81 29.06,48.4 U2.25
  BOTTOM w0.254: v1(25.65,66.65) 25.65,66.75 25.35,67.05 U1.29
LCD_D11: length 34.1
  TOP w0.254: v1(24.85,66.65) 24.85,51.48 28.73,47.6 U2.26
  BOTTOM w0.254: U1.30 v1(24.85,66.65)
LCD_D12: length 39.6
  TOP w0.254: v1(24.2,69.5) 24.2,50.99 28.39,46.8 U2.27
  BOTTOM w0.254: U1.33 22.25,70.15 22.9,69.5 v1(24.2,69.5)
LCD_D13: length 40.8
  TOP w0.254: U2.28 28.06,46 23.57,50.5 23.57,70.17 v1(23.58,70.18)
  BOTTOM w0.254: v1(23.58,70.18) 23.11,70.65 U1.34
LCD_D14: length 43.1
  TOP w0.254: U2.29 27.73,45.2 22.9,50.03 22.9,70.4 v1(23.6,71.1)
  BOTTOM w0.254: v1(23.6,71.1) 23.55,71.15 U1.35
LCD_D15: length 44.9
  TOP w0.254: 20.5,71.6 20.55,71.55 v1(20.55,71.65) 22.4,69.8 22.4,49.4 27.4,44.4 U2.30
  BOTTOM w0.254: U1.36 v1(20.55,71.65)
LCD_LEDA: length 14.2
  TOP w0.508: v1(49.9,52.7) 49.9,54.7 49,55.6 U2.16
  BOTTOM w0.508: R3.1 v1(49.9,52.7) R4.1
LCD_LEDK1: length 9.8
  TOP w0.508: v1(46,50.4) 46,53.3 44.5,54.8 U2.17
  BOTTOM w0.508: R7.1 v1(46,50.4)
LCD_LEDK2: length 10.2
  TOP w0.508: U2.18 44.1,54 45.24,52.86 45.24,49.66 v1(46,48.9)
  BOTTOM w0.508: R8.1 v1(46,48.9)
LCD_LEDK3: length 10.7
  TOP w0.508: U2.19 43.8,53.2 44.5,52.5 44.5,48.9 v1(46,47.4)
  BOTTOM w0.508: R9.1 v1(46,47.4)
LCD_LEDK4: length 11.2
  TOP w0.508: U2.20 43.4,52.4 43.8,52 43.8,48.1 v1(46,45.9)
  BOTTOM w0.508: R11.1 v1(46,45.9)
LCD_RD: length 29.2
  TOP w0.254: U2.10 30.3,60.4 28.3,62.4 v1(28.3,71.5)
  BOTTOM w0.254: U1.37 27.65,72.15 v1(28.3,71.5)
LCD_RS: length 29.3
  TOP w0.254: U2.8 30.6,62 29.41,63.19 29.41,72.39 v1(28.3,73.5)
  BOTTOM w0.254: v1(28.3,73.5) 27.95,73.15 U1.39
LCD_WR: length 29.1
  TOP w0.254: v1(28.3,72.4) 28.3,72.4 29,71.7 29,62.7 30.5,61.2 U2.9
  BOTTOM w0.254: v1(28.3,72.4) 28.05,72.65 U1.38
LED0: length 74.5
  TOP w0.254: D5.2 2.18,16.48 5.2,19.5 5.2,35.8 6.9,37.5 18.3,37.5 20.2,39.4 v1(20.2,57.3)
  BOTTOM w0.254: U1.41 19.65,74.15 19.3,73.8 19.3,58.2 v1(20.2,57.3)
NRST: length 123
  TOP w0.254: U2.31 26.5,43.6 21.6,48.5 v1(21.6,54.6) ; J4.3 9.75,74.1 22.8,74.1 28.2,79.5 31.6,79.5 32.3,78.8 v1(32.3,74.65)
  BOTTOM w0.254: C19.1 4.66,64.76 3.7,63.8 2.2,63.8 1.4,63 1.4,57.8 SW1.3 3.9,57.7 6.1,57.7 9.2,54.6 v1(21.6,54.6) 23.6,54.6 25.03,53.17 25.03,51.6 ; C19.1 1.7,67.76 1.7,78.3 3.55,80.15 J4.3 ; C19.1 R23.2 ; U1.7 v1(32.3,74.65)
OSC32_IN: length 12.3
  BOTTOM w0.254: U1.3 34.65,76.65 38.7,80.7 39.66,80.7 C13.2 43.45,81.6 X1.2
OSC32_OUT: length 12.1
  BOTTOM w0.254: U1.4 34.72,76.15 38.27,79.7 39.66,79.7 C14.2 43.45,78.8 X1.1
OSC_IN: length 12
  BOTTOM w0.254: U1.5 37.25,75.65 37.74,75.16 R18.1 40.56,75.22 C16.2 43.2,76.7 X2.2
OSC_OUT: length 12.5
  BOTTOM w0.254: X2.1 43.2,72.1 C17.2 40.5,72.14 R18.2 38.46,73.64 36.95,75.15 U1.6
PC0: length 23.8
  BOTTOM w0.254: U1.8 35.25,74.15 39.9,69.5 43.5,69.5 47.2,65.8 U7.16
PC1: length 27.6
  BOTTOM w0.254: U1.9 35.15,73.65 39.8,69 43.3,69 44.24,68.06 R21.2 44.24,56.96 45.27,55.92 U7.11
PC2: length 50.8
  BOTTOM w0.254: 47.2,56.58 49.12,56.58 49.9,55.8 49.9,54.49 50.79,53.6 54.84,53.6 55.09,53.35 55.09,52.06 54.84,51.81 41.1,51.81 39.4,53.51 39.4,68.7 34.95,73.15 U1.10
PC3: length 53.4
  BOTTOM w0.254: U1.11 34.85,72.65 38.9,68.6 38.9,53.3 40.8,51.4 55.2,51.4 55.6,51.8 55.6,53.6 55.1,54.1 51,54.1 50.4,54.7 50.4,57 49.52,57.88 U7.14
PC13: length 45
  BOTTOM w0.254: U1.2 32.55,77.15 32.3,77.4 32.3,77.9 37.6,83.2 46.2,83.2 48.8,80.6 48.8,58.9 48.42,58.52 U7.15
RTS#: length 30.5
  BOTTOM w0.254: R38.2 20.14,37.5 13.5,37.5 12.1,38.91 U12.14 12.1,41.3 12.3,41.5 13.8,41.5 14,41.3 14,39 14.4,38.6 19.4,38.6 19.9,39.1 19.9,43.6 21.28,44.98 Q3.2
RXD: length 5.3
  BOTTOM w0.254: R35.2 10.2,47.9 12.1,46.01 U12.3
SD_CS: length 53
  TOP w0.254: v1(26.6,42.8) v1(32,42.8)
  BOTTOM w0.254: U13.2 15.8,30.66 R42.1 16.64,33.44 18.2,35 24.6,35 26.6,37 v1(26.6,42.8) ; v1(32,42.8) 32,66.9 31.35,67.55 U1.17
SPI1_MISO: length 65.2
  BOTTOM w0.254: U1.22 28.85,35.24 27.31,33.71 24.11,33.71 23.3,32.9 23.3,27.6 25.23,25.66 U11.2 25.23,22.23 24.9,21.9 17,21.9 16.64,22.26 R37.2 16.6,25.16 U13.7
SPI1_MOSI: length 50.6
  BOTTOM w0.254: U1.23 28.35,35.45 27.1,34.2 23.8,34.2 22.7,33.1 22.7,31.37 U11.5 22.7,30.85 22.44,30.6 17.54,30.6 R41.1 16.5,29.56 U13.3
SPI1_SCK: length 74
  BOTTOM w0.254: U1.21 29.35,35.04 27.61,33.3 24.5,33.3 23.96,32.77 U11.6 23.96,27.93 25.83,26.07 25.83,21.83 25.2,21.2 15.3,21.2 14.4,20.3 12.5,20.3 12,20.8 12,26.6 12.76,27.36 U13.5
SWCLK: length 7.5
  BOTTOM w0.254: R31.2 5.8,76.7 5.6,76.5 2.9,76.5 2.5,76.1 2.5,73.85 J4.6
SWDIO: length 2.2
  BOTTOM w0.254: J4.5 5.79,75.15 R30.2
TXD: length 5.1
  BOTTOM w0.254: R34.2 9.16,46.7 10.2,46.7 10.82,46.08 U12.2
U1_RXD: length 63.2
  BOTTOM w0.254: U1.43 19.25,75.15 18.3,74.2 18.3,57.3 20,55.6 23.7,55.6 25.89,53.41 25.89,50.4 25.65,50.15 24.65,50.15 23.9,50.9 23.9,52.3 22.3,53.9 8.1,53.9 5.6,51.4 5.6,46.9 6.1,46.4 7.26,46.4 R34.1
U1_TXD: length 59.2
  BOTTOM w0.254: U1.42 19.46,74.65 18.8,73.99 18.8,57.55 20.25,56.1 23.91,56.1 26.3,53.71 26.3,49.99 25.96,49.65 24.44,49.65 23.4,50.69 23.4,52.09 22.09,53.4 8.31,53.4 6.54,51.63 R35.1
WK_UP: length 68.5
  BOTTOM w0.254: SW2.4 SW2.3 29.5,22.95 29.5,26.3 33.1,29.9 33.1,64.5 35.69,67.09 35.69,69.91 34.45,71.15 U1.14
WORK_CURR: length 27.5
  BOTTOM w0.254: U1.16 32.46,70.15 31.61,71 31.61,77.83 37.64,83.86 U4.4 U4.3 45.27,83.86 TP1.1 45.75,83.65 U3.1
WORK_VOLT: length 36.2
  BOTTOM w0.254: TP2.1 C3.1 ; C3.1 44.2,87.16 R15.2 R12.1 ; C3.1 44.14,85.44 43.84,85.14 U4.1 U4.6 38.34,85.14 31.2,78 31.2,70.8 32.4,69.6 34.3,69.6 34.53,69.83 34.53,70.47 34.35,70.65 U1.15
X+: length 15.3
  TOP w0.254: U2.12 v1(54.4,58.8)
  BOTTOM w0.254: U7.2 54.03,58.52 54.3,58.8 v1(54.4,58.8)
X-: length 15.2
  TOP w0.254: U2.14 v1(54.4,57.2)
  BOTTOM w0.254: U7.4 54.38,57.23 v1(54.4,57.2)
Y+: length 15.3
  TOP w0.254: U2.13 v1(54.4,58)
  BOTTOM w0.254: v1(54.4,58) 54.27,57.88 U7.3
Y-: length 15.3
  TOP w0.254: U2.15 v1(54.4,56.4)
  BOTTOM w0.254: 52.8,56.58 54.23,56.58 v1(54.4,56.4)
N16347098: length 2.2
  BOTTOM w0.254: J4.2 5.79,82.65 R24.2
N16758351: length 6
  BOTTOM w0.254: J3.4 10.8,60.8 10.8,64.56 R32.2
N16765796: length 2.7
  TOP w0.254: D5.1 v1(5.7,16.4)
  BOTTOM w0.254: v1(5.7,16.4) R40.2
N16765844: length 2.7
  TOP w0.254: D6.1 v1(5.7,14.3)
  BOTTOM w0.254: v1(5.7,14.3) R43.2
N16768175: length 4.7
  BOTTOM w0.254: Q3.3 21.53,47.97 21.24,48.26 R33.2 21.4,49.76 21.4,51.43 D4.2
N16768221: length 1.9
  BOTTOM w0.254: R36.1 23.32,43.85 Q3.1
N16768285: length 3.8
  BOTTOM w0.254: Q4.1 23.32,39.08 24,38.4 24,37.04 R38.1
N16768335: length 1.7
  BOTTOM w0.254: Q4.2 21.28,37.85 R39.1
N16768347: length 6.8
  BOTTOM w0.254: X4.2 14.7,50 14.7,48.06 C32.2 15.76,47 16.3,47 17.18,46.12 U12.7
N16768483: length 3.2
  BOTTOM w0.508: U12.4 13.37,46.37 C28.2
N16768587: length 6.2
  BOTTOM w0.254: U12.8 18.45,46.39 C33.2 17.1,48.06 17.1,50 X4.1
N16779903: length 8.1
  BOTTOM w0.508: Q1.3 52.03,50.4 R7.2 R8.2 R9.2 R11.2
N16788225: length 8.5
  BOTTOM w0.254: U9.2 11.03,76.87 11.85,76.05 X3.2 11.85,72.55 12.3,72.1 C22.2
N16788621: length 3
  BOTTOM w0.254: X3.1 9.35,75.35 9.6,75.6 U9.1
N16797952: length 3.9
  BOTTOM w0.254: Q2.1 92.22,65.48 R29.2 R27.2
N16797968: length 4.1
  BOTTOM w0.254: Q2.3 94.73,70.07 B1.2
N16802315: length 3.5
  BOTTOM w0.254: U3.4 49.85,85.55 49.36,86.04 C2.1 49.3,87.16 R6.1
N16802319: length 3.4
  BOTTOM w0.254: R5.1 47.8,87.14 C2.2 47.84,85.94 47.45,85.55 U3.3
N16805416: length 1.5
  BOTTOM w0.254: R22.1 R19.2
N16805448: length 2.2
  BOTTOM w0.254: C4.1 30.75,92.99 U5.1
N16805476: length 4.5
  BOTTOM w0.254: U5.3 30.41,96.25 R19.1 R16.2
N16816363: length 3.6
  BOTTOM w0.254: U5.4 33.35,96.25 32.86,96.74 R20.2 R17.1
N163465880: length 4.1
  TOP w0.254: U8.1 v1(91,51.7)
  BOTTOM w0.254: v1(91,51.7) D3.1
N167571795: length 6.2
  BOTTOM w0.254: J3.3 13.48,60.66 13.48,64.08 14.2,64.8 R28.2
N167799601: length 2.1
  BOTTOM w0.254: R14.2 53.12,46.15 Q1.1

## Copper pours and planes (outline as drawn; the poured copper is in the pictures)
GND on TOP, BOTTOM: 96.7,99.8 3.3,99.8 0.2,96.7 0.2,3.3 3.3,0.2 96.7,0.2 99.8,3.3 99.8,96.7
VCC_3.3V on BOTTOM: 14.9,88.2 18.3,88.2 18.7,88.6 18.7,91.9 15.1,91.9 14.6,91.4 14.6,88.5
VCC_5V on BOTTOM: 24.4,91.8 28.8,91.8 29.2,91.4 29.2,84.7 28.6,84.1 19.4,84.1 19.4,86.9 19.9,87.4 21.3,87.4 21.5,87.6 21.5,88.5 21.4,88.6 19.8,88.6 19.8,89.3 21.8,89.3 22,89.1 22,86.7 22.3,86.4 24.2,86.4 24.4,86.6
VCC_IN on TOP: 17.3,99.7 46.2,99.7 46.8,99.1 46.8,91.3 44.8,91.3 44.8,94.6 44.1,95.3 17.6,95.3 16.7,96.2 16.7,99.1
VCC_OUT on TOP: 50.4,91.3 50.4,98.8 52.5,98.8 52.5,95.4 53.5,94.4 85.9,94.4 86.7,95.2 86.7,99.1 87.3,99.7 90.8,99.7 91.3,99.2 91.3,93.1 89.5,91.3
N16805446 on BOTTOM: 32.9,94.7 34.7,94.7 35,94.4 35,89.7 35.5,89.2 38.1,89.2 38.4,88.9 38.4,86.8 38.2,86.6 32.7,86.6 32.4,86.9 32.4,94.2
